# Altium PCB PCB_2020-07-05_23-21-58_2020-08-29_20-08-56.pcbdoc
Units mil, origin at the board's own origin, x right, y up, seen from the top; angles counter-clockwise.
Board outline 3460.63 x 3500 mil, 2 copper layers (Top Layer, Bottom Layer); 24 components, 20 nets, 68 pads, 12 vias.
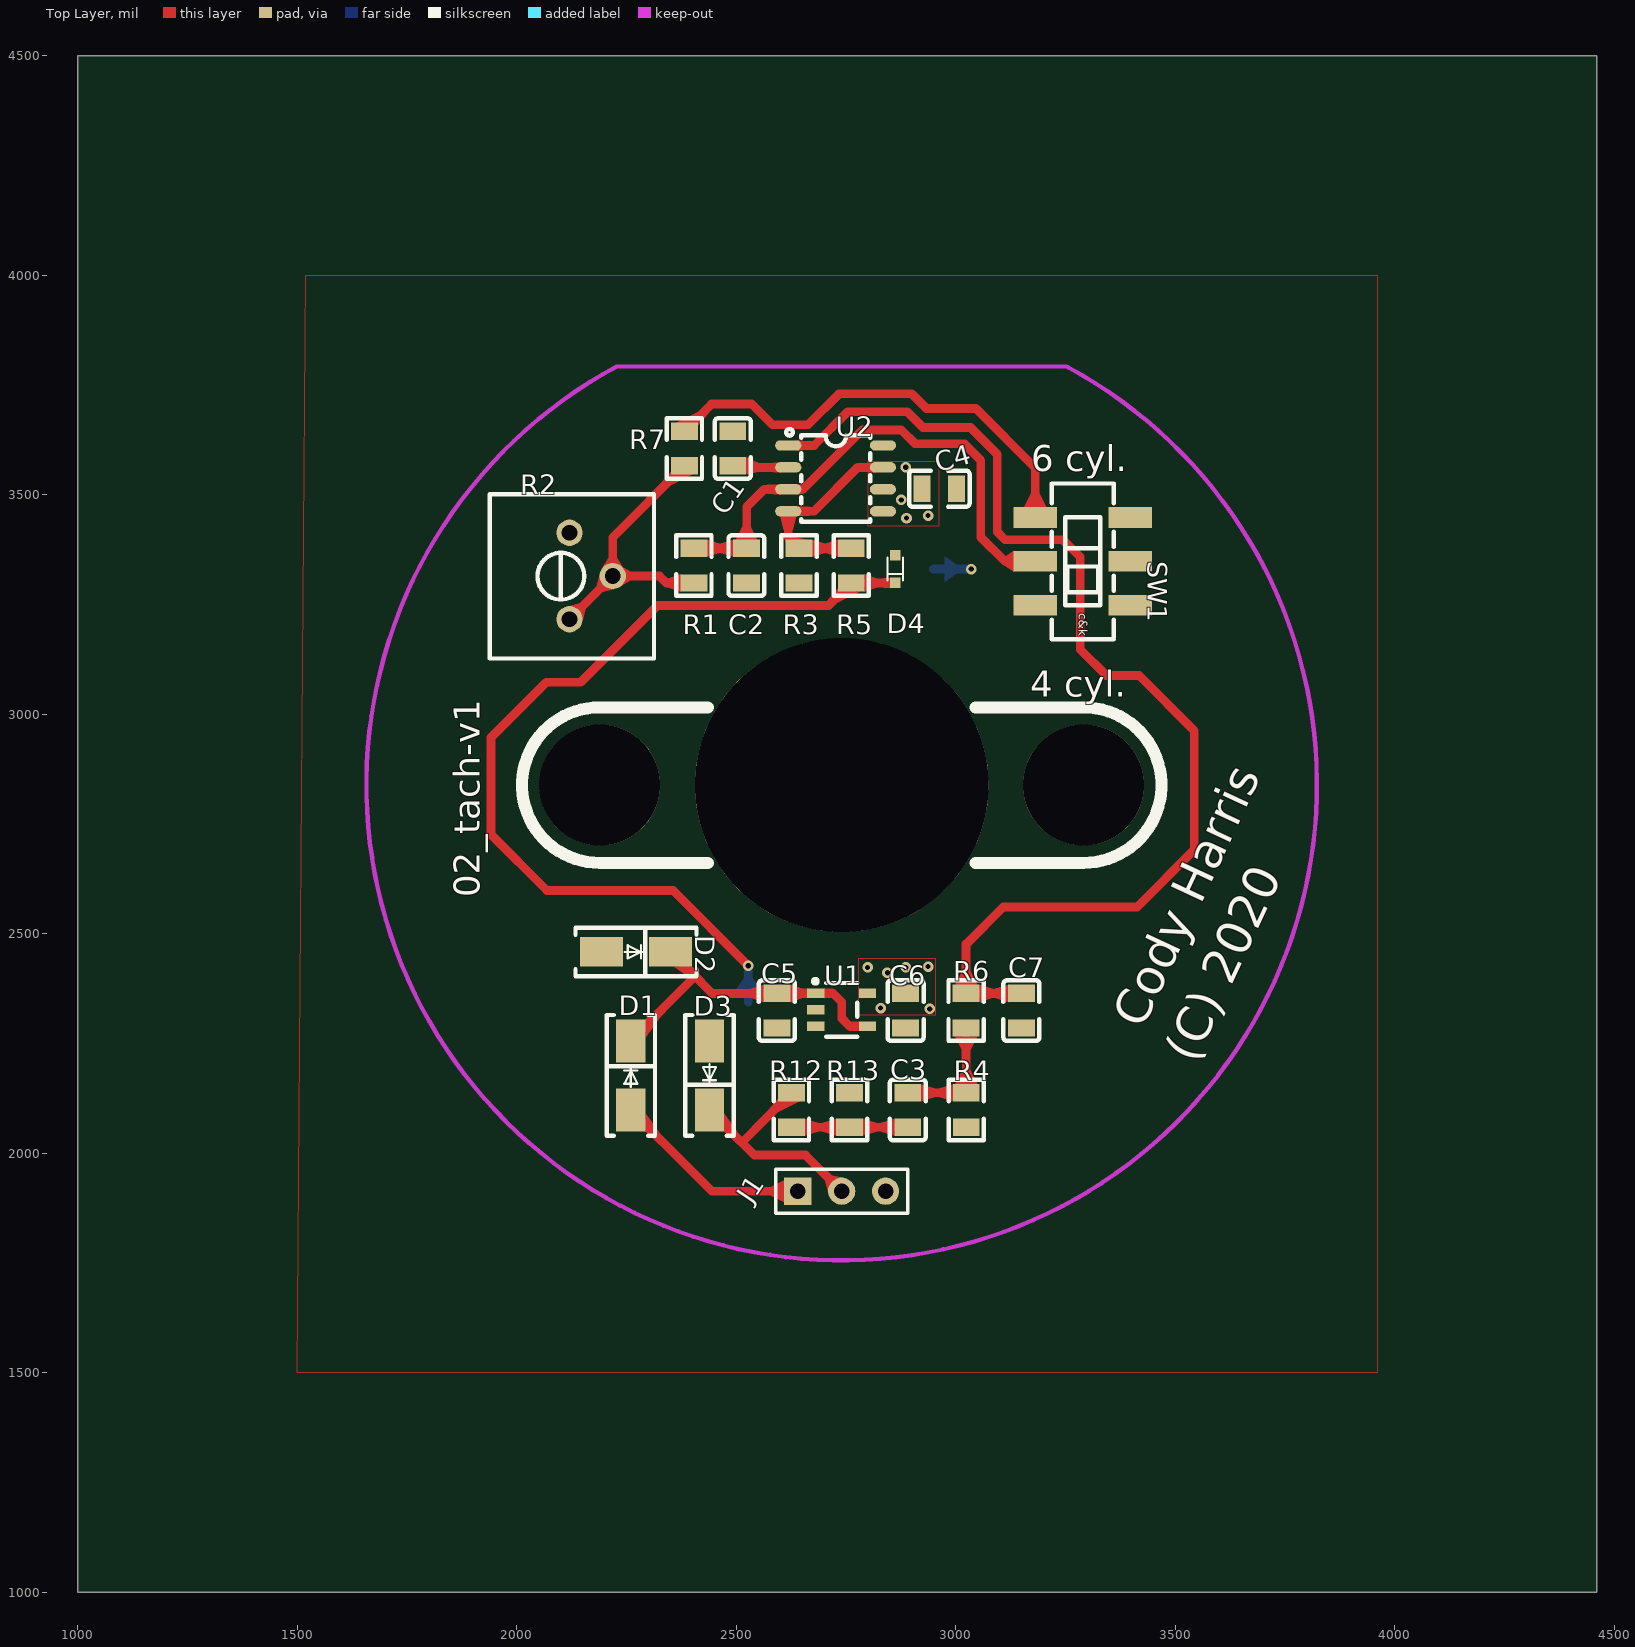
[diagram p0: Top Layer view]
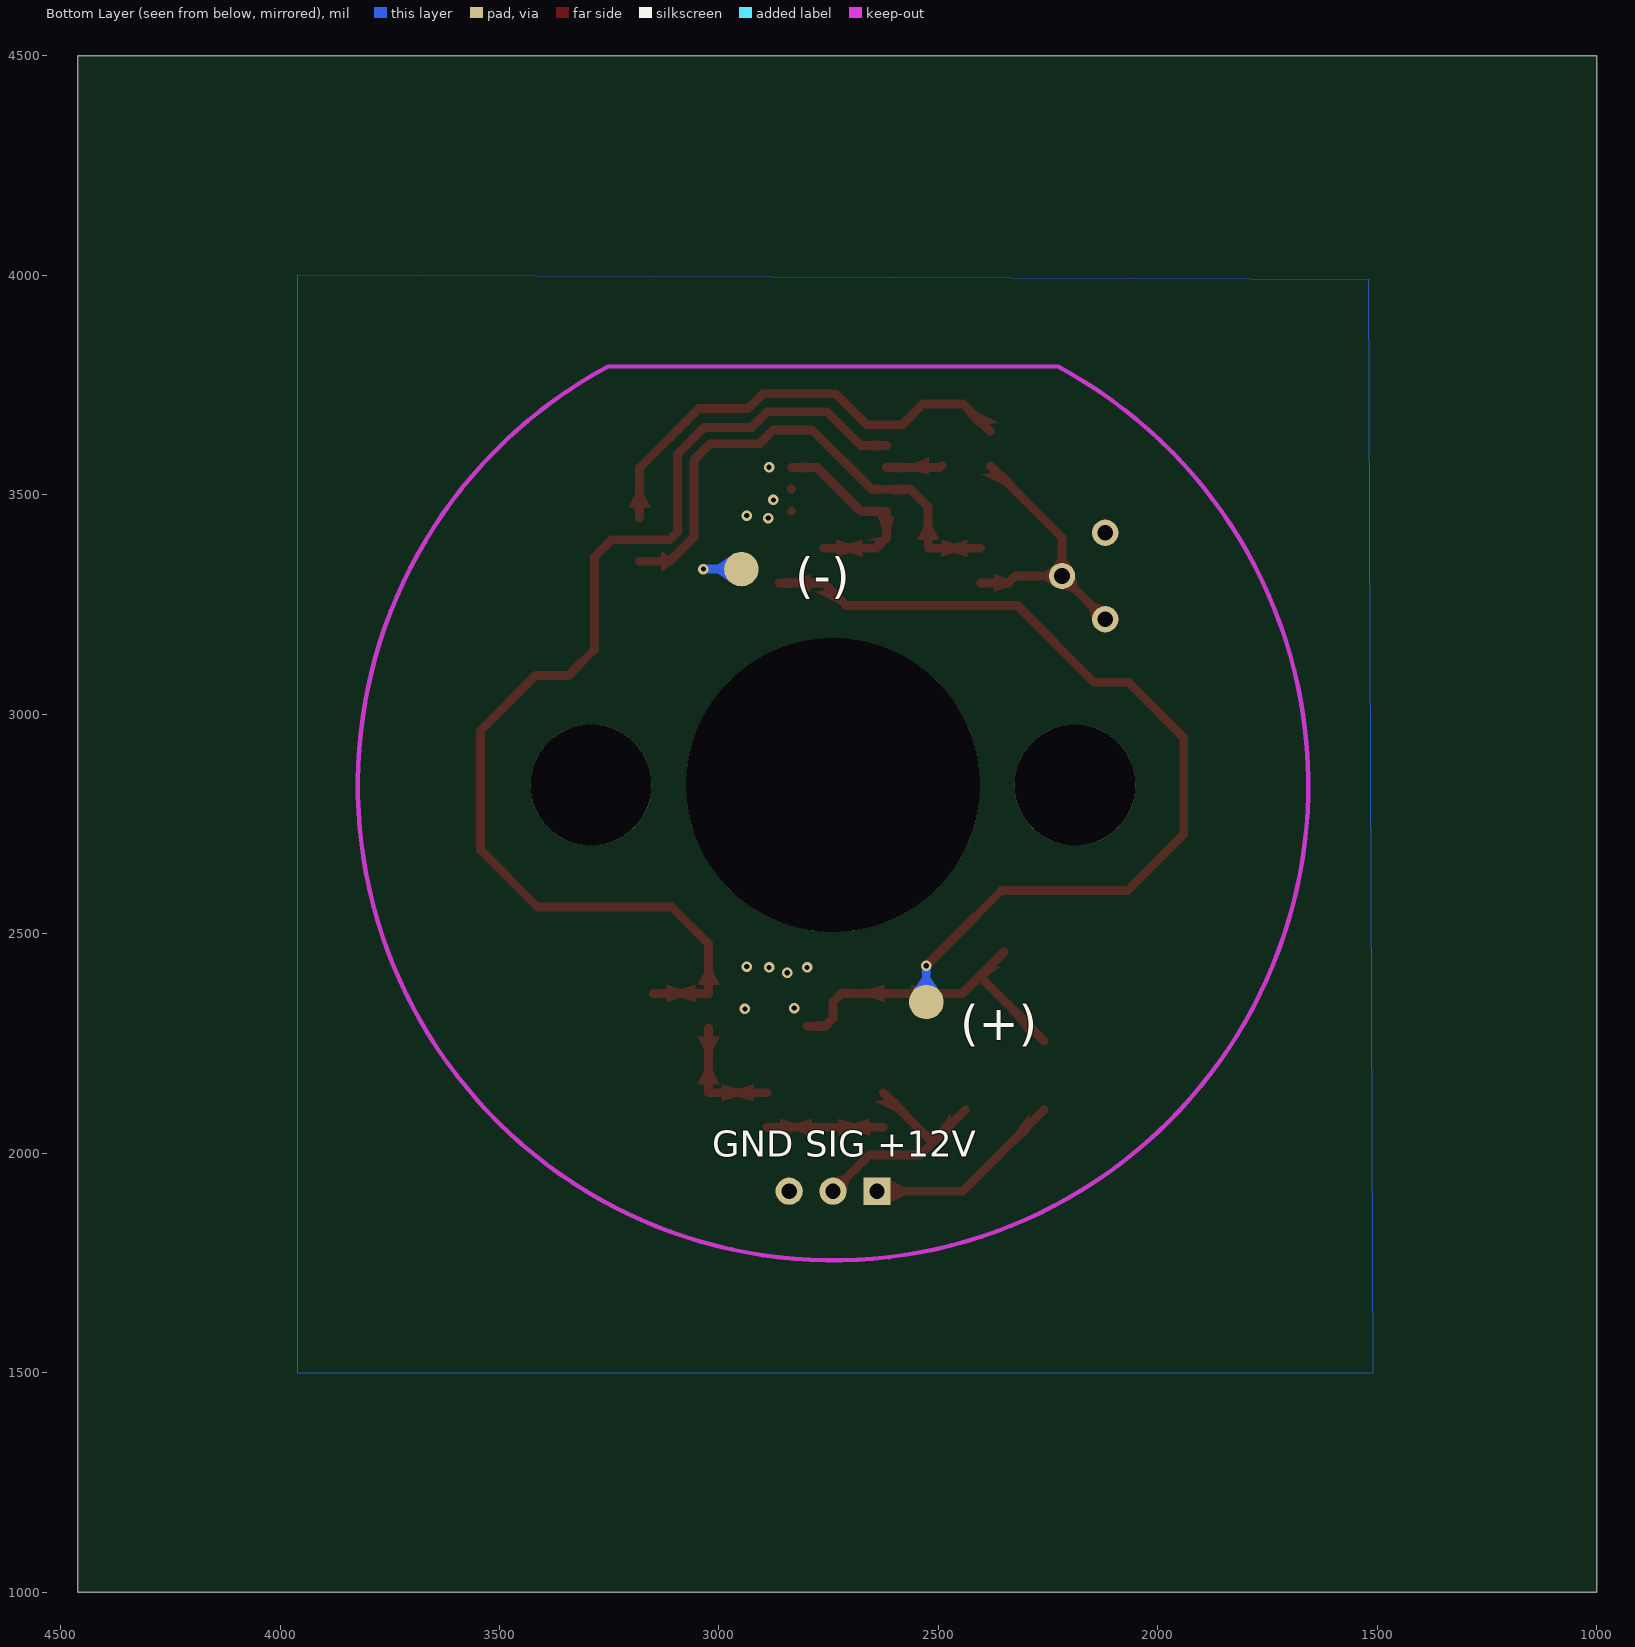
[diagram p1: Bottom Layer view, seen from below]

## Layer stack, top to bottom
Top Layer: signal copper (thickness not stored)
Dielectric: dielectric 12.6, FR-4, Dk 4.8
Bottom Layer: signal copper (thickness not stored)

## Board outline
4460.63,1000 1000,1000 1000,4500 4460.63,4500

## Components (designator, comment, footprint, x,y, rotation, side; value= is the part's Value field where it differs from the comment)
C1 "22n" C0805 2492.13,3605.31 r270 top
C2 "2.2u" C0805 2523.23,3338.58 r90 top
C3 "0.1u" C0805 2890.87,2098.43 r270 top
C4 "0.1u" C0805 2962.6,3513.78 r180 top
C5 "1u" C0805 2592.52,2324.8 r90 top
C6 "1u" C0805 2885.83,2324.8 r90 top
C7 "10n" C0805 3149.61,2324.8 r90 top
D1 "SBR1U150SA-13" DIODE-SMA_2PIN-L4.60-W2.92-PITCH4.00-B 2259.85,2177.17 r90 top
D2 "SMAJ17CAQ-13-F" DIODE-SMA_2PIN-L4.60-W2.92-PITCH4.00-B 2271.66,2458.66 r0 top
D3 "SMAJ17CAQ-13-F" DIODE-SMA_2PIN-L4.60-W2.92-PITCH4.00-B 2438.98,2177.17 r270 top
D4 "BZT52C2V0T-7" SOD-523_L1.2-W0.8-LS1.6-RD 2862.21,3330.71 r90 top
J1 "HDR-M-2.54_1x3" HDR-M-2.54_1X3 2740.16,1913.39 r0 top
R1 "20k" R0805 2403.55,3338.58 r90 top
R2 "20k" RES-ADJ_3386P 2169.3,3314.96 r0 top
R3 "10k" R0805 2642.92,3338.58 r90 top
R4 "56k" R0805 3023.86,2098.43 r90 top
R5 "0" R0805 2761.83,3338.58 r90 top
R6 "100k" R0805 3023.62,2324.8 r270 top
R7 "39k" R0805 2381.89,3605.31 r90 top
R12 "56k" R0805 2625.67,2098.43 r270 top
R13 "56k" R0805 2757.88,2098.43 r270 top
SW1 "JS202011SCQN" SW-SMD_JS202011SCQN 3289.37,3348.42 r270 top
U1 "MCP1804T-A002I/OT" SOT-23-5_L3.0-W1.7-P0.95-LS2.8-BL 2740.16,2326.77 r270 top
U2 "LM2907MX-8/NOPB" SOIC-8_L4.9-W3.9-P1.27-LS6.0-BL 2726.38,3537.4 r270 top

## Footprints (in the part's own frame and the unit in brackets; to place one, negate y for a bottom-side part, rotate by r counter-clockwise, add the part's x,y. Pads: shape width x height; smd on the part's side, far side on the other; paste and mask are expansions set on the pad)
C0805 [mm]
  rect 1x1.55 smd: 1(-1,0) 2(1,0)
  silkscreen extent -1.75,-1.04 1.75,1.04
DIODE-SMA_2PIN-L4.60-W2.92-PITCH4.00-B [mm]
  rect 2.5x1.7 smd: 1(-2,0) 2(2,0)
  silkscreen extent -3.5,-1.4 3.5,1.4
HDR-M-2.54_1X3 [mil]
  rect 62x62 hole 35: 1(-100,0)
  round 62 hole 35: 2(0,0) 3(100,0)
  silkscreen extent -150,-50 150,50
R0805 [mm]
  rect 1x1.55 smd: 1(-1,0) 2(1,0)
  silkscreen extent -1.75,-1.02 1.75,1.02
RES-ADJ_3386P [mil]
  round 60 hole 35.43: 1(-49.21,-98.43) 2(49.21,-0.01) 3(-49.21,98.43)
  silkscreen extent -231,-188 143,186
SOD-523_L1.2-W0.8-LS1.6-RD [mm]
  rect 0.6x0.6 smd: 1(-0.8,0) 2(0.8,0)
  silkscreen extent -0.65,-0.45 0.65,0.45
SOIC-8_L4.9-W3.9-P1.27-LS6.0-BL [mm]
  oval 0.6x1.518 smd: 1(-1.905,-2.74) 2(-0.635,-2.74) 3(0.635,-2.74) 4(1.905,-2.74) 5(1.905,2.74) 6(0.635,2.74) 7(-0.635,2.74) 8(-1.905,2.74)
  silkscreen extent -2.86,-2.86 2.5,2
SOT-23-5_L3.0-W1.7-P0.95-LS2.8-BL [mm]
  rect 0.55x1 smd: 1(-0.95,-1.5) 2(0,-1.5) 3(0.95,-1.5) 4(0.95,1.5) 5(-0.95,1.5)
  silkscreen extent -1.78,-1.65 1.55,0.9
SW-SMD_JS202011SCQN [mm]
  rect 1.2x2.5 smd: 1(-2.54,-2.75) 2(0,-2.75) 3(2.54,-2.75) 4(-2.54,2.75) 5(0,2.75) 6(2.54,2.75)
  silkscreen extent -4.5,-1.8 4.5,1.8

## Free pads (board coordinates)
  round 78.74 smd far side: 1(2527.56,2344.5) 2(2948.82,3330.71)
  round 275.59 hole 275.59 unplated: ""(2188.98,2838.58) ""(3291.34,2838.58)
  round 669.29 hole 669.29 unplated: ""(2740.16,2838.58)

## Via types
v1: diameter 24, hole 12, Top Layer to Bottom Layer, 12 vias

## Nets (pads, with @x,y where several pads share a name; then routed paths per layer and width w, separated by ;. In a path a pad name is that pad's centre, name@x,y a point inside that pad or via, vN(x,y) a via of type N, cw(c..) or ccw(c..) an arc to the next point about the centre after c; other vN are vias at no path point)
C1_2: C1.2 U2.2 | length 127.9
  Top Layer w20: C1.2 2495.67,3562.4 U2.2
C2_2: C2.2 R1.2 SW1.2 U2.3 | length 1190.5
  Top Layer w20: R1.2 C2.2 ; C2.2@2523.26,3377.98 2523.66,3472.48 2563.56,3512.38 U2.3@2618.56,3512.38 ; U2.3@2638.36,3512.38 U2.3@2618.56,3512.38 ; SW1.2 3112.21,3348.42 3057.09,3403.54 3057.09,3578.74 3019.69,3616.14 2907.48,3616.14 2875.99,3647.64 2787.4,3647.64 2652.15,3512.38 U2.3@2618.56,3512.38
D2_2: C5.2 D1.2 D2.2 U1.1 U1.4 | length 748.2
  Top Layer w20: D1.2@2259.86,2255.88 2406.06,2402.98 ; D2.2 2444.89,2364.17 C5.2 U1.1 2720.47,2364.17 2740.16,2344.49 2740.16,2307.09 2757.88,2289.37 U1.4
GND: C1.1 C2.1 C4.1 C5.1 C6.1 C7.1 D2.1 D3.1 D4.2 J1.3 pad.2 R2.3 R3.1 R4.1 R13.1 U1.2 U2.8 | length 86.6
  Bottom Layer w20: pad.2 v1(3035.44,3330.7)
METER_OUT: D4.1 pad.1 R5.1 | length 3895.1
  Top Layer w20: 2468.51,2486.22 2356.3,2598.43 ; v1(2527.56,2427.16) 2356.3,2598.43 ; R5.1@2761.86,3299.18 D4.1 ; 1940.95,2726.38 1940.95,2822.84 1940.95,2946.85 ; 1940.95,2726.38 2068.9,2598.43 ; 1940.95,2726.38 1940.95,2946.85 ; 1940.95,2726.38 2068.9,2598.43 ; 1940.95,2946.85 2066.93,3072.83 ; 1940.95,2946.85 2066.93,3072.83 ; 2066.93,3072.83 2145.67,3072.83 ; 2066.93,3072.83 2145.67,3072.83 ; 2068.9,2598.43 2356.3,2598.43 ; 2068.9,2598.43 2356.3,2598.43 ; 2145.67,3072.83 2320.87,3248.03 ; 2145.67,3072.83 2320.87,3248.03 ; 2320.87,3248.03 2710.63,3248.03 ; 2320.87,3248.03 2710.63,3248.03 ; 2710.63,3248.03 R5.1 2710.63,3248.03
  Bottom Layer w20: pad.1 v1(2527.56,2427.16)
R2_1: R1.1 R2.1 R2.2 R7.1 | length 649.4
  Top Layer w20: R2.1 R2.2 ; R7.1 2218.51,3402.55 R2.2 ; R1.1 2340.55,3299.21 2324.81,3314.95 R2.2
R3_2: R3.2 R5.2 U2.4 U2.7 | length 470.6
  Top Layer w20: R5.2 R3.2 2618.52,3402.35 U2.4 2676.97,3462.4 2776.97,3562.4 U2.7
R4_2: C3.1 R4.2 R6.2 | length 280.7
  Top Layer w20: C3.1 R4.2 R6.2@3023.66,2285.48
R12_2: C3.2 R12.2 R13.2 | length 265.2
  Top Layer w20: R12.2 R13.2 C3.2
S$34: 
S$38: 
S$40: 
S$44: 
S$626: 
S$3136: 
SW1_1: R7.2 SW1.1 | length 1062.8
  Top Layer w20: R7.2 2443.9,3706.69 2535.44,3706.69 2582.68,3659.45 2663.39,3659.45 2734.26,3730.31 2899.61,3730.31 2933.07,3696.85 3045.28,3696.85 3181.1,3561.03 SW1.1 SW1.1@3181.1,3454.73
TACH_IN: D3.2 J1.2 R12.1 | length 557.4
  Top Layer w19.68: J1.2 J1.2@2740.16,1933.08
  Top Layer w20: D3.2 2541.34,1996.07 2657.48,1996.07 J1.2 ; 2512.96,2024.38 R12.1
U2_1: C7.2 R6.1 U2.1 | length 2602.9
  Top Layer w20: U2.1@2618.56,3612.38 2677.16,3612.18 2753.96,3688.98 2889.76,3688.98 2925.16,3653.58 3033.46,3653.58 3094.46,3592.48 3094.46,3415.38 3112.16,3397.68 3244.06,3397.68 3283.46,3358.28 3283.46,3147.68 3342.56,3088.58 3417.36,3088.58 3543.26,2962.58 3543.26,2690.98 3413.36,2560.98 3108.26,2560.98 3023.66,2476.38 R6.1@3023.66,2364.18 ; R6.1 C7.2
VBAT: D1.1 J1.1 | length 457
  Top Layer w20: D1.1 2444.89,1913.38 J1.1
VCC: C4.2 C6.2 U1.5 U2.5 U2.6 | length 2.5
  Top Layer w20: U2.5 cw(c2834.46,3462.4) U2.5@2834.46,3462.6 ; U2.6 cw(c2835.64,3512.4) U2.6@2835.64,3513.78
  other v1: 2940.95,2328.74 2828.74,2330.71 2844.49,2411.41 2799.22,2423.23 2885.83,2423.23 2937.01,2425.19 2887.8,3446.85 2937.01,3452.75 2875.99,3488.18 2885.83,3562.99
pads on no net: SW1.3 SW1.4 SW1.5 SW1.6 U1.3

## Polygon pours and split planes (outlines as drawn)
VCC on Bottom Layer (solid): 1519.69,3990.16 3960.63,4000 3960.63,1500 1509.85,1500
GND on Top Layer (solid): 1519.69,4000 3960.63,4000 3960.63,1500 1500,1500
VCC on Top Layer (solid): 2777.56,2314.96 2954.73,2314.96 2954.73,2442.91 2777.56,2442.91
VCC on Top Layer (solid): 2799.22,3429.13 2962.6,3429.13 2962.6,3574.8 2799.22,3574.8

## Keep-outs
Keep-Out Layer:
  lines w10 net S$626: 2227.48,3792.18 ccw(c2740.16,2838.58) 3255.82,3790.57

## Other copper
Top Layer:
  region net U2_1: 2636.7,3624.21 2636.56,3600.59 2666.57,3602.22 2666.69,3622.22
  region net C1_2: 2600.41,3550.59 2600.41,3574.21 2570.41,3572.4 2570.41,3552.4
  region net C2_2: 2636.65,3524.21 2636.61,3500.59 2652.14,3502.38 2652.17,3522.38
  region net C2_2: 2600.42,3500.59 2600.4,3524.21 2570.4,3522.38 2570.42,3502.38
  region net R3_2: 2636.63,3450.59 2600.41,3450.59 2608.52,3420.59 2628.52,3420.59
  region net R3_2: 2636.63,3450.59 2636.63,3474.21 2666.63,3472.4 2666.63,3452.4
  region net R3_2: 2816.15,3550.59 2816.15,3574.21 2786.15,3572.4 2786.15,3552.4
  region net D2_2: 2293.31,2305.12 2293.31,2264.54 2323.31,2305.54 2323.31,2333.91
  region net VBAT: 2293.31,2089.96 2293.31,2049.21 2323.31,2020.82 2323.31,2049.1
  region net R3_2: 2673.43,3397.64 2673.43,3358.27 2703.43,3367.95 2703.43,3387.95
  region net R3_2: 2612.41,3391.07 2661.97,3397.64 2631.01,3404.01 2611.45,3395.28
  region net TACH_IN: 2472.45,2089.96 2472.45,2049.21 2502.45,2020.82 2502.45,2049.1
  region net D2_2: 2399.61,2425.2 2358.87,2425.2 2399.73,2395.2 2428.01,2395.2
  region net D2_2: 2700.79,2375 2700.79,2353.35 2720.47,2354.17 2720.47,2374.17
  region net D2_2: 2661.42,2353.35 2661.42,2375 2631.42,2374.17 2631.42,2354.17
  region net D2_2: 2779.53,2278.54 2779.53,2300.2 2757.87,2299.37 2757.87,2279.37
  region net VBAT: 2609.16,1888.38 2609.16,1938.38 2579.16,1923.38 2579.16,1903.38
  region net D2_2: 2562.01,2344.49 2562.01,2383.86 2532.01,2374.17 2532.01,2354.17
  region net D2_2: 2623.04,2383.86 2623.04,2344.49 2653.04,2354.17 2653.04,2374.17
  region net R4_2: 2998.83,2157.48 3048.83,2157.48 3033.79,2187.48 3013.79,2187.48
  region net R4_2: 2993.35,2118.11 2993.35,2157.48 2963.35,2147.8 2963.35,2127.8
  region net R2_1: 2373.04,3279.53 2373.04,3318.9 2343.04,3309.21 2343.04,3289.21
  region net C2_2: 2434.06,3397.64 2434.06,3358.27 2464.06,3367.95 2464.06,3387.95
  region net C2_2: 2498.34,3397.64 2548.34,3397.64 2533.47,3427.64 2513.47,3427.64
  region net C2_2: 2492.72,3358.27 2492.72,3397.64 2462.72,3387.95 2462.72,3367.95
  region net C2_2: 3131.89,3324.8 3131.89,3372.04 3112.21,3358.42 3112.21,3338.42
  region net SW1_1: 3156.1,3472.04 3206.1,3472.04 3191.1,3502.04 3171.1,3502.04
  region net METER_OUT: 2850.4,3287.4 2850.4,3311.02 2820.4,3309.18 2820.4,3289.18
  region net R12_2: 2788.39,2078.74 2788.39,2039.37 2818.39,2049.06 2818.39,2069.06
  region net R12_2: 2727.36,2039.37 2727.36,2078.74 2697.36,2069.05 2697.36,2049.05
  region net TACH_IN: 2644.77,2118.11 2595.16,2124.39 2571.21,2097.18 2596.26,2094.01
  region net R12_2: 2656.19,2078.74 2656.19,2039.37 2686.19,2049.05 2686.19,2069.05
  region net R2_1: 2400.95,3546.26 2351.38,3552.84 2327.55,3525.75 2352.52,3522.43
  region net SW1_1: 2362.84,3664.37 2412.41,3657.79 2436.24,3684.89 2411.27,3688.2
  region net METER_OUT: 2780.87,3279.53 2731.3,3286.11 2707.47,3259.01 2732.44,3255.7
  region net METER_OUT: 2780.87,3279.53 2731.3,3286.11 2707.47,3259.01 2732.44,3255.7
  region net METER_OUT: 2792.33,3318.9 2792.33,3279.53 2822.33,3289.18 2822.33,3309.18
  region net R3_2: 2731.3,3358.27 2731.3,3397.64 2701.3,3387.95 2701.3,3367.95
  region net U2_1: 2998.66,2383.86 3048.66,2383.86 3033.66,2413.86 3013.66,2413.86
  region net U2_1: 3054.14,2383.86 3054.14,2344.49 3084.14,2354.17 3084.14,2374.17
  region net R4_2: 3048.69,2265.75 2998.69,2265.75 3013.73,2235.75 3033.73,2235.75
  region net U2_1: 3119.1,2344.49 3119.1,2383.86 3089.1,2374.17 3089.1,2354.17
  region net C1_2: 2522.64,3585.63 2522.64,3546.26 2552.64,3552.4 2552.64,3572.4
  region net R12_2: 2860.36,2039.37 2860.36,2078.74 2830.36,2069.06 2830.36,2049.06
  region net R4_2: 2921.38,2157.48 2921.38,2118.11 2951.38,2127.8 2951.38,2147.8
  region net METER_OUT: 2528.32,2439.14 2515.58,2426.41 2508.94,2431.65 2523.08,2445.79
  region net TACH_IN: 2709.22,1911.44 2742.1,1944.32 2717.39,1950.3 2703.25,1936.15
  region net R2_1: 2118.21,3246.47 2150.03,3214.66 2156.04,3238.35 2141.89,3252.49
  region net R2_1: 2238.35,3292.45 2238.35,3337.45 2259.35,3324.96 2259.35,3304.96
  region net R2_1: 2241.01,3334.8 2196.01,3334.79 2208.5,3355.79 2228.5,3355.8
  region net R2_1: 2188.57,3316.84 2220.38,3285.01 2196.7,3279 2182.56,3293.15
Bottom Layer:
  region net METER_OUT: 2536.56,2419.23 2518.56,2419.22 2517.56,2410.82 2537.56,2410.83
  region net GND: 3027.51,3321.7 3027.5,3339.7 3019.11,3340.71 3019.1,3320.71
  region net GND: 2974.86,3301.18 2974.86,3360.23 3002.42,3340.71 3002.42,3320.71
  region net METER_OUT: 2557.09,2370.53 2498.03,2370.54 2517.56,2398.09 2537.56,2398.09

## Silkscreen, mask and mechanical layers (free items; w line width, h text height)
Top Overlay:
  lines w27.56: 3291.34,2661.42 ccw(c3291.34,2838.58) 3291.33,3015.75
  lines w27.56 net S$3136: 2435.07,2661.41 2189.02,2661.41 cw(c2188.99,2838.58) 2188.99,3015.75 2435.04,3015.75 ; 3045.3,2661.42 3291.35,2661.42 ; 3045.28,3015.75 3291.33,3015.75
  text "6 cyl." at 3171.96,3553.15 h59.05
  text "4 cyl." at 3169.29,3039.37 h59.05
  text "02_tach-v1" at 1915.36,2582.67 h59.05 r90
  text "Cody Harris" at 3426.02,2280.34 h80 r65
  text "(C) 2020" at 3544.13,2201.6 h80 r65
Bottom Overlay:
  text "(-)" at 2826.77,3276.92 h80
  text "(+)" at 2450.79,2257.24 h80
  text "GND SIG +12V" at 3015.75,1992.13 h59.05
Document:
  lines w0.1: 2729.32,2749 2731.32,2751

## Text inside footprints (layer, text, board x,y; h text height)
SW1: Top Overlay "c&k" at 3280.58,3230.3 h19.68 r270